# EAGLE board light_120mm_v1_0 (EAGLE 9.6.1)

Size 120 x 120 mm. Coordinates in mm from the lower left corner, seen from the top.
Outline: circle at 60,60 radius 60
Copper layers (1*16): Top 0.035mm / dielectric 1.5mm / Bottom 0.035mm
Design rules "default": minimum track width 6mil, minimum drill 0.35mm, track to track 6mil, track to pad 6mil, pad to pad 6mil, via to via 6mil, smd to smd 6mil, copper to edge 40mil, drill to drill 6mil, minimum pad ring 10mil, minimum via ring 8mil, stop-mask expansion 4mil, vias tented up to drill 0mil, thermal gap 10mil

## Footprints (pad centres in the part's own frame; a part is rotated, then mirrored left to right if it is on the bottom)
C0805 = smd 1.3 x 1.5: 1 -0.95,0; 2 0.95,0
LED5050_W = smd 2 x 1.2: 1-VDD 2.7,-1.65; 2-DOUT 2.7,1.65; 3-GND -2.7,1.65; 4-DIN -2.7,-1.65

## Placement (x,y rotation side)
C1  [C0805]  124.84,64.53 4 top  (outside the outline)
C2  [C0805]  118.19,88.97 26.5 top
C3  [C0805]  102.7,109.01 49 top
C4  [C0805]  80.73,121.6 71.4 top
C5  [C0805]  55.62,124.85 93.9 top  (outside the outline)
C6  [C0805]  31.17,118.25 116.4 top
C7  [C0805]  11.09,102.81 138.8 top
C8  [C0805]  -1.56,80.88 161.3 top
C9  [C0805]  -4.86,55.77 183.7 top  (outside the outline)
C10  [C0805]  1.68,31.3 206.2 top
C11  [C0805]  17.07,11.19 228.7 top
C12  [C0805]  38.98,-1.51 251.1 top
C13  [C0805]  64.08,-4.87 273.6 top  (outside the outline)
C14  [C0805]  88.56,1.61 296.1 top
C15  [C0805]  108.71,16.96 318.5 top
C16  [C0805]  121.46,38.84 341 top
C17  [C0805]  112.05,53.15 352.5 top
C18  [C0805]  109.87,76.41 18.2 top
C19  [C0805]  97.81,96.42 43.9 top
C20  [C0805]  78.26,109.22 69.6 top
C21  [C0805]  55.1,112.27 95.4 top
C22  [C0805]  32.9,104.97 121.1 top
C23  [C0805]  16.08,88.76 146.8 top
C24  [C0805]  7.95,66.85 172.5 top
C25  [C0805]  10.13,43.59 198.2 top
C26  [C0805]  22.19,23.58 223.9 top
C27  [C0805]  41.74,10.78 249.6 top
C28  [C0805]  64.9,7.73 275.4 top
C29  [C0805]  87.1,15.03 301.1 top
C30  [C0805]  103.92,31.24 326.8 top
C31  [C0805]  99.85,63.49 5 top
C32  [C0805]  92.77,82.94 35 top
C33  [C0805]  76.9,96.25 65 top
C34  [C0805]  56.51,99.85 95 top
C35  [C0805]  37.06,92.77 125 top
C36  [C0805]  23.75,76.9 155 top
C37  [C0805]  20.15,56.51 185 top
C38  [C0805]  27.23,37.06 215 top
C39  [C0805]  43.1,23.75 245 top
C40  [C0805]  63.49,20.15 275 top
C41  [C0805]  82.94,27.23 305 top
C42  [C0805]  96.25,43.1 335 top
C43  [C0805]  88.01,52.49 345 top
C44  [C0805]  85.11,74.5 30 top
C45  [C0805]  67.51,88.01 75 top
C46  [C0805]  45.5,85.11 120 top
C47  [C0805]  31.99,67.51 165 top
C48  [C0805]  34.89,45.5 210 top
C49  [C0805]  52.49,31.99 255 top
C50  [C0805]  74.5,34.89 300 top
C51  [C0805]  78.22,63.21 10 top
C52  [C0805]  66.33,77.38 70 top
C53  [C0805]  48.11,74.17 130 top
C54  [C0805]  41.78,56.79 190 top
C55  [C0805]  53.67,42.62 250 top
C56  [C0805]  71.89,45.83 310 top
C57  [C0805]  68.5,54 0 top
C58  [C0805]  66,68.5 90 top
C59  [C0805]  51.4,66 180 top
C60  [C0805]  54,51.5 270 top
C61  [C0805]  66,51.5 270 top
LED1  [LED5050_W]  123.7,72.96 11.5 top
LED2  [LED5050_W]  113.91,96.32 33.9 top
LED3  [LED5050_W]  95.94,114.16 56.4 top
LED4  [LED5050_W]  72.51,123.78 78.9 top
LED5  [LED5050_W]  47.19,123.73 101.3 top
LED6  [LED5050_W]  23.81,113.99 123.8 top
LED7  [LED5050_W]  5.92,96.06 146.3 top
LED8  [LED5050_W]  -3.75,72.66 168.8 top
LED9  [LED5050_W]  -3.75,47.34 191.3 top
LED10  [LED5050_W]  5.92,23.94 213.7 top
LED11  [LED5050_W]  23.81,6.01 236.2 top
LED12  [LED5050_W]  47.19,-3.73 258.7 top
LED13  [LED5050_W]  72.51,-3.78 281.1 top
LED14  [LED5050_W]  95.94,5.84 303.6 top
LED15  [LED5050_W]  113.91,23.68 326.1 top
LED16  [LED5050_W]  123.7,47.04 348.5 top
LED17  [LED5050_W]  112.5,60 0 top
LED18  [LED5050_W]  107.3,82.78 25.8 top
LED19  [LED5050_W]  92.73,101.05 51.4 top
LED20  [LED5050_W]  71.68,111.18 77.2 top
LED21  [LED5050_W]  48.32,111.18 102.8 top
LED22  [LED5050_W]  27.27,101.05 128.6 top
LED23  [LED5050_W]  12.7,82.78 154.2 top
LED24  [LED5050_W]  7.5,60 180 top
LED25  [LED5050_W]  12.7,37.22 205.8 top
LED26  [LED5050_W]  27.27,18.95 231.4 top
LED27  [LED5050_W]  48.32,8.82 257.2 top
LED28  [LED5050_W]  71.68,8.82 282.8 top
LED29  [LED5050_W]  92.73,18.95 308.6 top
LED30  [LED5050_W]  107.3,37.22 334.2 top
LED31  [LED5050_W]  98.64,70.35 15 top
LED32  [LED5050_W]  88.28,88.28 45 top
LED33  [LED5050_W]  70.35,98.64 75 top
LED34  [LED5050_W]  49.65,98.64 105 top
LED35  [LED5050_W]  31.72,88.28 135 top
LED36  [LED5050_W]  21.36,70.35 165 top
LED37  [LED5050_W]  21.36,49.65 195 top
LED38  [LED5050_W]  31.72,31.72 225 top
LED39  [LED5050_W]  49.65,21.36 255 top
LED40  [LED5050_W]  70.35,21.36 285 top
LED41  [LED5050_W]  88.28,31.72 315 top
LED42  [LED5050_W]  98.64,49.65 345 top
LED43  [LED5050_W]  89,60 0 top
LED44  [LED5050_W]  80.51,80.51 45 top
LED45  [LED5050_W]  60,89 90 top
LED46  [LED5050_W]  39.49,80.51 135 top
LED47  [LED5050_W]  31,60 180 top
LED48  [LED5050_W]  39.49,39.49 225 top
LED49  [LED5050_W]  60,31 270 top
LED50  [LED5050_W]  80.51,39.49 315 top
LED51  [LED5050_W]  76.02,69.25 30 top
LED52  [LED5050_W]  60,78.5 90 top
LED53  [LED5050_W]  43.98,69.25 150 top
LED54  [LED5050_W]  43.98,50.75 210 top
LED55  [LED5050_W]  60,41.5 270 top
LED56  [LED5050_W]  76.02,50.75 330 top
LED57  [LED5050_W]  68.5,60 270 top
LED58  [LED5050_W]  60,68.5 0 top
LED59  [LED5050_W]  51.5,60 90 top
LED60  [LED5050_W]  60,51.5 180 top
LED61  [LED5050_W]  60,60 0 top

## Library data of the parts
C1-C61 = rcl; SPICEPREFIX: C
LED1-LED61 = SK6812

## Nets
GND: C1.2 C2.2 C3.2 C4.2 C5.2 C6.2 C7.2 C8.2 C9.2 C10.2 C11.2 C12.2 C13.2 C14.2 C15.2 C16.2 C17.2 C18.2 C19.2 C20.2 C21.2 C22.2 C23.2 C24.2 C25.2 C26.2 C27.2 C28.2 C29.2 C30.2 C31.2 C32.2 C33.2 C34.2 C35.2 C36.2 C37.2 C38.2 C39.2 C40.2 C41.2 C42.2 C43.2 C44.2 C45.2 C46.2 C47.2 C48.2 C49.2 C50.2 C51.2 C52.2 C53.2 C54.2 C55.2 C56.2 C57.2 C58.2 C59.2 C60.2 C61.2 LED1.3-GND LED2.3-GND LED3.3-GND LED4.3-GND LED5.3-GND LED6.3-GND LED7.3-GND LED8.3-GND LED9.3-GND LED10.3-GND LED11.3-GND LED12.3-GND LED13.3-GND LED14.3-GND LED15.3-GND LED16.3-GND LED17.3-GND LED18.3-GND LED19.3-GND LED20.3-GND LED21.3-GND LED22.3-GND LED23.3-GND LED24.3-GND LED25.3-GND LED26.3-GND LED27.3-GND LED28.3-GND LED29.3-GND LED30.3-GND LED31.3-GND LED32.3-GND LED33.3-GND LED34.3-GND LED35.3-GND LED36.3-GND LED37.3-GND LED38.3-GND LED39.3-GND LED40.3-GND LED41.3-GND LED42.3-GND LED43.3-GND LED44.3-GND LED45.3-GND LED46.3-GND LED47.3-GND LED48.3-GND LED49.3-GND LED50.3-GND LED51.3-GND LED52.3-GND LED53.3-GND LED54.3-GND LED55.3-GND LED56.3-GND LED57.3-GND LED58.3-GND LED59.3-GND LED60.3-GND LED61.3-GND
N$1: LED1.2-DOUT LED2.4-DIN
N$2: LED2.2-DOUT LED3.4-DIN
N$3: LED3.2-DOUT LED4.4-DIN
N$4: LED4.2-DOUT LED5.4-DIN
N$5: LED5.2-DOUT LED6.4-DIN
N$6: LED6.2-DOUT LED7.4-DIN
N$7: LED7.2-DOUT LED8.4-DIN
N$8: LED8.2-DOUT LED9.4-DIN
N$9: LED9.2-DOUT LED10.4-DIN
N$10: LED10.2-DOUT LED11.4-DIN
N$11: LED11.2-DOUT LED12.4-DIN
N$12: LED12.2-DOUT LED13.4-DIN
N$13: LED13.2-DOUT LED14.4-DIN
N$14: LED14.2-DOUT LED15.4-DIN
N$23: LED15.2-DOUT LED16.4-DIN
N$24: LED43.4-DIN LED56.2-DOUT
N$25: LED17.2-DOUT LED18.4-DIN
N$26: LED18.2-DOUT LED19.4-DIN
N$27: LED19.2-DOUT LED20.4-DIN
N$28: LED20.2-DOUT LED21.4-DIN
N$29: LED21.2-DOUT LED22.4-DIN
N$30: LED22.2-DOUT LED23.4-DIN
N$31: LED23.2-DOUT LED24.4-DIN
N$32: LED24.2-DOUT LED25.4-DIN
N$33: LED25.2-DOUT LED26.4-DIN
N$34: LED26.2-DOUT LED27.4-DIN
N$35: LED27.2-DOUT LED28.4-DIN
N$36: LED28.2-DOUT LED29.4-DIN
N$37: LED29.2-DOUT LED30.4-DIN
N$38: LED31.4-DIN LED50.2-DOUT
N$39: LED31.2-DOUT LED32.4-DIN
N$40: LED32.2-DOUT LED33.4-DIN
N$41: LED33.2-DOUT LED34.4-DIN
N$42: LED34.2-DOUT LED35.4-DIN
N$43: LED35.2-DOUT LED36.4-DIN
N$44: LED36.2-DOUT LED37.4-DIN
N$45: LED37.2-DOUT LED38.4-DIN
N$46: LED38.2-DOUT LED39.4-DIN
N$47: LED39.2-DOUT LED40.4-DIN
N$48: LED40.2-DOUT LED41.4-DIN
N$49: LED41.2-DOUT LED42.4-DIN
N$50: LED17.4-DIN LED42.2-DOUT
N$51: LED43.2-DOUT LED44.4-DIN
N$52: LED44.2-DOUT LED45.4-DIN
N$53: LED45.2-DOUT LED46.4-DIN
N$54: LED46.2-DOUT LED47.4-DIN
N$55: LED47.2-DOUT LED48.4-DIN
N$56: LED48.2-DOUT LED49.4-DIN
N$57: LED49.2-DOUT LED50.4-DIN
N$58: LED1.4-DIN LED30.2-DOUT
N$59: LED51.2-DOUT LED52.4-DIN
N$60: LED52.2-DOUT LED53.4-DIN
N$61: LED53.2-DOUT LED54.4-DIN
N$62: LED54.2-DOUT LED55.4-DIN
N$63: LED55.2-DOUT LED56.4-DIN
N$64: LED57.4-DIN LED61.2-DOUT
N$65: LED57.2-DOUT LED58.4-DIN
N$66: LED58.2-DOUT LED59.4-DIN
N$67: LED59.2-DOUT LED60.4-DIN
N$69: LED51.4-DIN LED60.2-DOUT
VCC: C1.1 C2.1 C3.1 C4.1 C5.1 C6.1 C7.1 C8.1 C9.1 C10.1 C11.1 C12.1 C13.1 C14.1 C15.1 C16.1 C17.1 C18.1 C19.1 C20.1 C21.1 C22.1 C23.1 C24.1 C25.1 C26.1 C27.1 C28.1 C29.1 C30.1 C31.1 C32.1 C33.1 C34.1 C35.1 C36.1 C37.1 C38.1 C39.1 C40.1 C41.1 C42.1 C43.1 C44.1 C45.1 C46.1 C47.1 C48.1 C49.1 C50.1 C51.1 C52.1 C53.1 C54.1 C55.1 C56.1 C57.1 C58.1 C59.1 C60.1 C61.1 LED1.1-VDD LED2.1-VDD LED3.1-VDD LED4.1-VDD LED5.1-VDD LED6.1-VDD LED7.1-VDD LED8.1-VDD LED9.1-VDD LED10.1-VDD LED11.1-VDD LED12.1-VDD LED13.1-VDD LED14.1-VDD LED15.1-VDD LED16.1-VDD LED17.1-VDD LED18.1-VDD LED19.1-VDD LED20.1-VDD LED21.1-VDD LED22.1-VDD LED23.1-VDD LED24.1-VDD LED25.1-VDD LED26.1-VDD LED27.1-VDD LED28.1-VDD LED29.1-VDD LED30.1-VDD LED31.1-VDD LED32.1-VDD LED33.1-VDD LED34.1-VDD LED35.1-VDD LED36.1-VDD LED37.1-VDD LED38.1-VDD LED39.1-VDD LED40.1-VDD LED41.1-VDD LED42.1-VDD LED43.1-VDD LED44.1-VDD LED45.1-VDD LED46.1-VDD LED47.1-VDD LED48.1-VDD LED49.1-VDD LED50.1-VDD LED51.1-VDD LED52.1-VDD LED53.1-VDD LED54.1-VDD LED55.1-VDD LED56.1-VDD LED57.1-VDD LED58.1-VDD LED59.1-VDD LED60.1-VDD LED61.1-VDD

## Tracks (layer width: path | path; a pad name or v marks a point on that pad's centre or on a via)
GND  (121 unrouted)
N$1  (1 unrouted)
N$2  (1 unrouted)
N$3  (1 unrouted)
N$4  (1 unrouted)
N$5  (1 unrouted)
N$6  (1 unrouted)
N$7  (1 unrouted)
N$8  (1 unrouted)
N$9  (1 unrouted)
N$10  (1 unrouted)
N$11  (1 unrouted)
N$12  (1 unrouted)
N$13  (1 unrouted)
N$14  (1 unrouted)
N$23  (1 unrouted)
N$24  (1 unrouted)
N$25  (1 unrouted)
N$26  (1 unrouted)
N$27  (1 unrouted)
N$28  (1 unrouted)
N$29  (1 unrouted)
N$30  (1 unrouted)
N$31  (1 unrouted)
N$32  (1 unrouted)
N$33  (1 unrouted)
N$34  (1 unrouted)
N$35  (1 unrouted)
N$36  (1 unrouted)
N$37  (1 unrouted)
N$38  (1 unrouted)
N$39  (1 unrouted)
N$40  (1 unrouted)
N$41  (1 unrouted)
N$42  (1 unrouted)
N$43  (1 unrouted)
N$44  (1 unrouted)
N$45  (1 unrouted)
N$46  (1 unrouted)
N$47  (1 unrouted)
N$48  (1 unrouted)
N$49  (1 unrouted)
N$50  (1 unrouted)
N$51  (1 unrouted)
N$52  (1 unrouted)
N$53  (1 unrouted)
N$54  (1 unrouted)
N$55  (1 unrouted)
N$56  (1 unrouted)
N$57  (1 unrouted)
N$58  (1 unrouted)
N$59  (1 unrouted)
N$60  (1 unrouted)
N$61  (1 unrouted)
N$62  (1 unrouted)
N$63  (1 unrouted)
N$64  (1 unrouted)
N$65  (1 unrouted)
N$66  (1 unrouted)
N$67  (1 unrouted)
N$69  (1 unrouted)
VCC  (121 unrouted)